# Altium PCB TeenAstro_ZH-1_2022-06-06.pcbdoc (part 2 of 2)
Units mm, origin at the board's own origin, x right, y up, seen from the top; angles counter-clockwise.
Board outline 53 x 62 mm, 4 copper layers (Top Layer, Mid-Layer 1, Mid-Layer 2, Bottom Layer); 108 components, 116 nets, 365 pads, 202 vias.
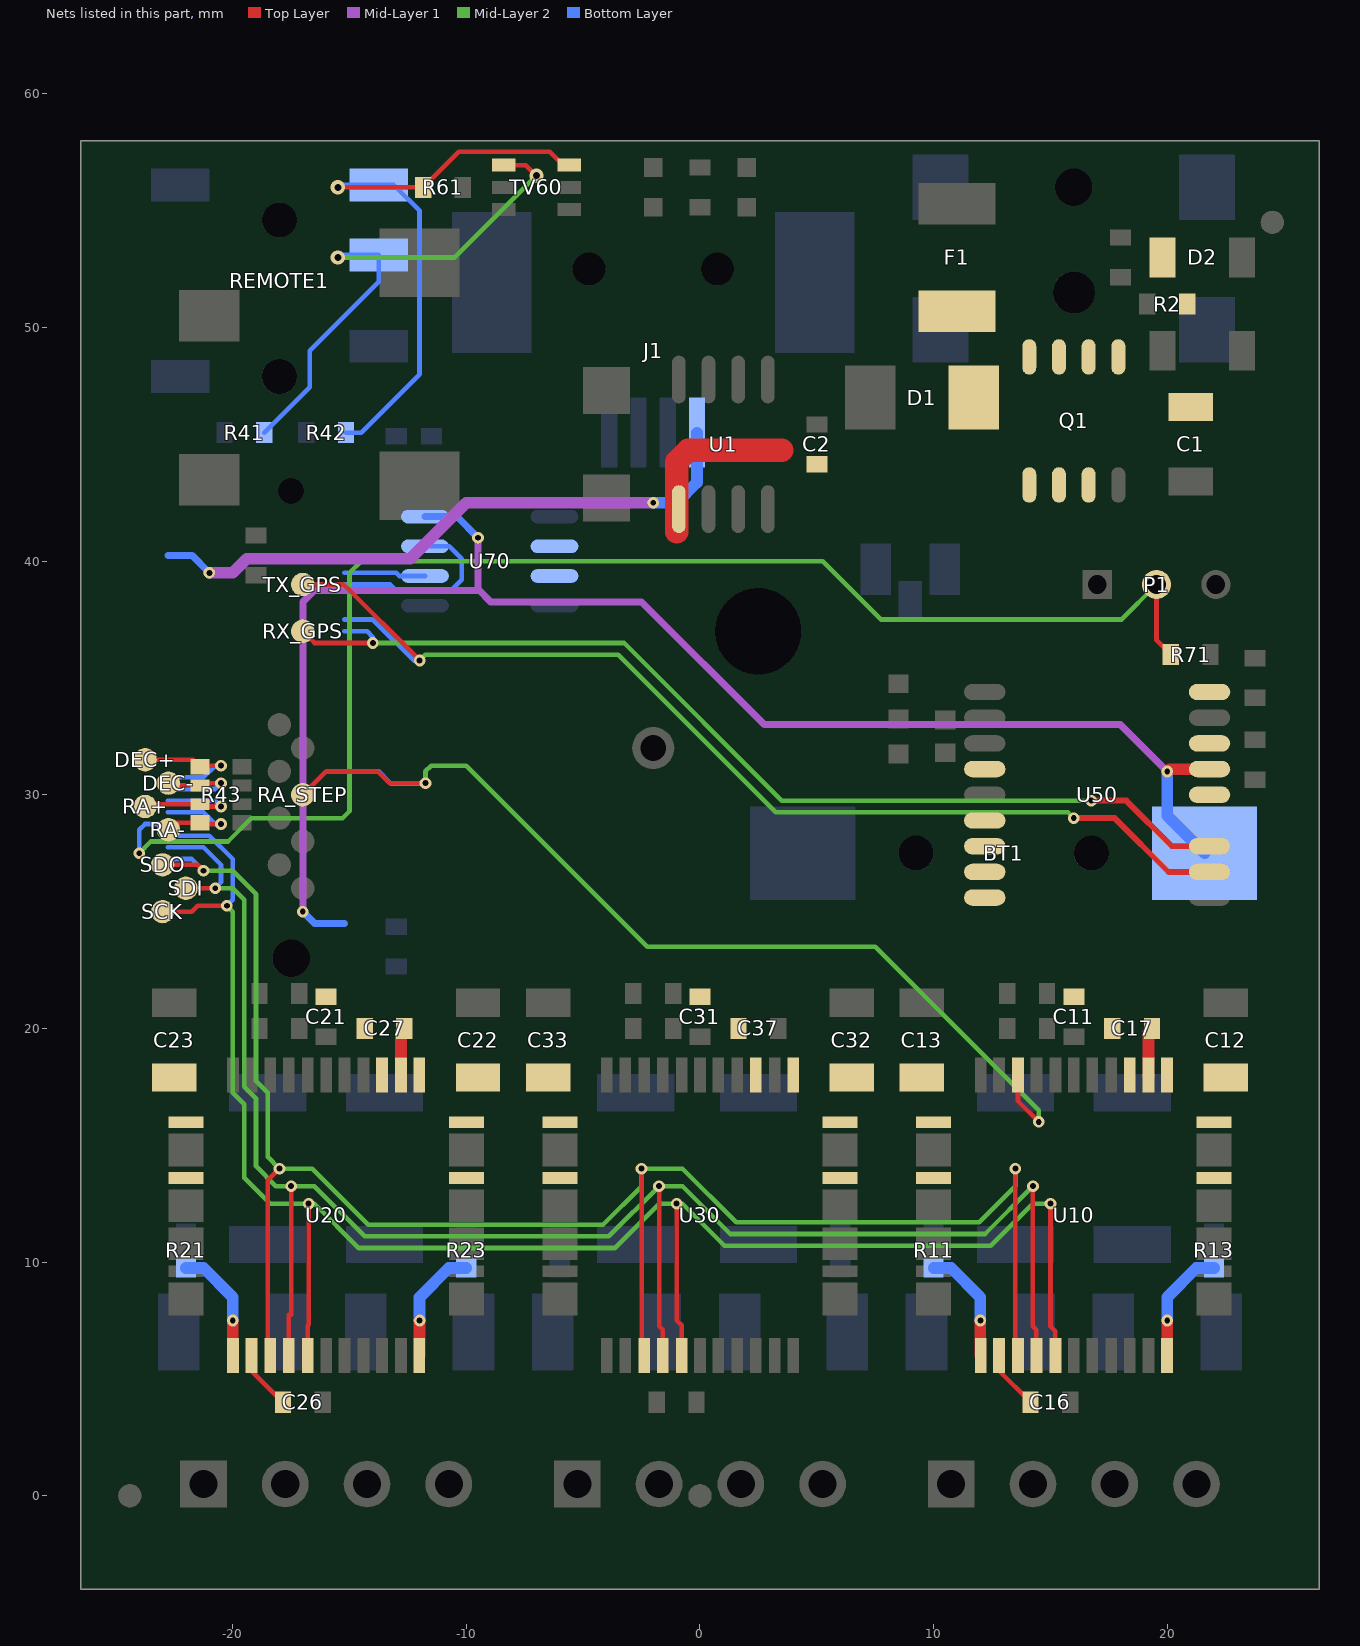
[diagram p4: the nets of this part, all layers, seen from the top]

## Via types
v1: diameter 1, hole 0.5, Top Layer to Bottom Layer, 111 vias
v2: diameter 0.5, hole 0.25, Top Layer to Bottom Layer, 84 vias
v3: diameter 0.61, hole 0.305, Top Layer to Bottom Layer, 7 vias

## Nets (pads, with @x,y where several pads share a name; then routed paths per layer and width w, separated by ;. In a path a pad name is that pad's centre, name@x,y a point inside that pad or via, vN(x,y) a via of type N, cw(c..) or ccw(c..) an arc to the next point about the centre after c; other vN are vias at no path point) (continued)
RA_STEP: RA_STEP.1 U10.42 | length 45.4
  Top Layer w0.2: RA_STEP.1@-17,30 -16,31 -13.786,31 -13.278,30.492 -11.758,30.492 v2(-11.75,30.5) ; U10.42@13.613,18.001 13.612,16.888 v2@14.499,15.999
  Mid-Layer 2 w0.2: v2(-11.75,30.5) -11.75,31 -11.501,31.249 -10,31.249 -2.25,23.5 7.501,23.5 14.499,16.499 v2@14.499,15.999
  Bottom Layer w0.2: -15.224,31 -13.749,31 -13.251,30.5 v2(-11.75,30.5)
  other v2: 14.5,16
RX_GPS: RX_GPS.1 U50.3 | length 44.2
  Top Layer w0.2: RX_GPS.1@-17,37.001 -16.499,36.5 v2(-14,36.5)
  Top Layer w0.25: v2(16.75,29.75) 18.25,29.751 20.201,27.8 U50.3@21.812,27.8
  Mid-Layer 2 w0.2: v2(-14,36.5) -3.251,36.499 3.498,29.751 v2(16.75,29.75)
  Bottom Layer w0.2: -15.224,37 -14.249,37 -14,36.751 v2(-14,36.5)
RX_REMOTE: R41.1 REMOTE1.3 TV60.4 | length 23
  Top Layer w0.2: TV60.4@-8.399,56.951 -7.449,56.951 v3(-7,56.5)
  Mid-Layer 2 w0.2: v3@-15.5,53 -10.5,53 v3(-7,56.5)
  Bottom Layer w0.2: R41.1@-18.65,45.5 -16.7,47.449 -16.7,49.001 -13.749,51.95 -13.749,53.101 -15.4,53.101 v3@-15.499,52.999
  other v3: -15.5,53
S$976: 
S$978: 
S$984: 
S$986: 
S$988: 
SCK: SCK.1 U10.16 U20.16 U30.16 | length 77.8
  Top Layer w0.2: SCK.1@-22.999,25.001 -21.75,25.001 -21.501,25.25 v2(-20.25,25.25) ; U20.16@-16.786,6.001 -16.786,7.287 -16.751,7.322 v2(-16.75,12.5) ; v2(-1,12.5) -1,7.5 -0.787,7.287 U30.16@-0.786,6.001 ; v2(15,12.5) 14.999,7.251 15.213,7.038 U10.16@15.213,6.001
  Mid-Layer 2 w0.2: v2(-20.25,25.25) -20,25.001 -20,17.251 -19.499,16.751 -19.499,13.601 -18.399,12.501 v2(-16.75,12.5) -16.499,12.501 -14.599,10.599 -3.65,10.599 -1.75,12.499 -1,12.499 -0.749,12.499 1.049,10.701 12.452,10.701 14.25,12.499 v2@14.999,12.499
  Bottom Layer w0.2: -22.776,28.249 -21,28.249 -20,27.251 -20,25.499 v2(-20.25,25.25)
SCL: U70.7 | length 8.1
  Bottom Layer w0.2: -15.224,39.001 -13.251,39.001 -12.951,38.699 -10.701,38.699 -10.2,39.199 -10.2,40.101 -10.736,40.635 U70.7@-11.772,40.635
SDA: U70.6 | length 3.5
  Bottom Layer w0.2: -15.224,39.499 -12.999,39.499 -12.865,39.365 U70.6@-11.772,39.365
SDI: SDI.1 U10.15 U20.15 U30.15 | length 77.1
  Top Layer w0.2: SDI.1@-22,26.001 v2(-20.75,26) ; U20.15@-17.599,6.001 -17.599,7.749 -17.5,7.749 v2(-17.5,13.25) ; v2(-1.75,13.25) -1.75,7.251 -1.6,7.099 U30.15@-1.6,6.001 ; v2(14.25,13.25) 14.25,7.251 14.4,7.101 U10.15@14.4,6.001
  Mid-Layer 2 w0.2: v2@-20.749,25.999 -20,25.999 -19.499,25.501 -19.499,17.5 -18.999,17 -18.999,14.099 -18.15,13.251 v2(-17.5,13.25) -16.502,13.251 -14.351,11.099 -3.901,11.099 v2(-1.75,13.25) -0.749,13.251 1.301,11.201 12.2,11.201 v2(14.25,13.25)
  Bottom Layer w0.2: -22.776,27.749 -21.249,27.749 -20.5,27 -20.5,26.25 v2@-20.749,25.999
SDO: SDO.1 U10.14 U20.14 U30.14 | length 79
  Top Layer w0.2: SDO.1@-23,27 -21.5,27 v2(-21.25,26.75) ; U20.14@-18.386,6.001 -18.501,6.116 -18.501,13.5 v2(-18,14) ; v2@-2.499,14 -2.499,6.113 U30.14@-2.386,6.001 ; v2@13.501,14 13.501,6.113 U10.14@13.613,6.001
  Mid-Layer 2 w0.2: v2@-21.249,26.751 -20,26.751 -18.999,25.75 -18.999,17.749 -18.501,17.251 -18.501,14.5 v2(-18,14) -16.601,14 -14.201,11.6 -4.15,11.6 -2.499,13.251 -2.499,14 -0.749,14 1.55,11.699 11.949,11.699 13.501,13.251 v2@13.501,14
  Bottom Layer w0.2: -22.776,27.251 -21.75,27.251 v2@-21.249,26.751
  other v2: -2.5,14 13.5,14
ST4_DEC+: DEC+.1 R43.5 | length 5.9
  Top Layer w0.2: DEC+.1@-23.749,31.501 -21.701,31.501 -21.399,31.201 -21.351,31.249 v2@-20.5,31.249
  Bottom Layer w0.2: -22.776,30.751 -21.249,30.751 -20.749,31.249 v2@-20.5,31.249
  other v2: -20.5,31.25
ST4_DEC-: DEC-.1 R43.6 | length 4.7
  Top Layer w0.2: DEC-.1@-22.749,30.5 -22.75,30.48 -22.669,30.401 -21.399,30.401 -21.3,30.5 v2(-20.5,30.5)
  Bottom Layer w0.2: -22.776,30.251 -20.749,30.251 v2(-20.5,30.5)
ST4_RA+: R43.7 RA+.1 | length 5.7
  Top Layer w0.2: RA+.1@-23.749,29.499 -23.649,29.601 -21.399,29.601 -21.3,29.499 v2@-20.5,29.499
  Bottom Layer w0.2: -22.776,29.751 -20.749,29.751 v2@-20.5,29.499
  other v2: -20.5,29.5
ST4_RA-: R43.8 RA-.1 | length 4.9
  Top Layer w0.2: RA-.1@-22.75,28.5 -22.451,28.801 -21.399,28.801 -21.351,28.75 v2(-20.5,28.75)
  Bottom Layer w0.2: -22.776,29.25 -21.249,29.25 -20.749,28.75 v2(-20.5,28.75)
TEMP: P1.2 R71.1 | length 61.9
  Top Layer w0.2: P1.2@19.541,39.001 19.541,36.611 R71.1@20.15,35.999
  Mid-Layer 2 w0.2: v2(-24,27.5) -23.499,28.001 -20.2,28.001 -19.199,29.001 -15.3,29.001 -15.001,29.301 -15.001,39.499 -14.5,40 5.251,40 7.75,37.5 18.04,37.5 P1.2@19.541,39.001
  Bottom Layer w0.2: v2(-24,27.5) -24,28.501 -23.751,28.75 -22.776,28.75
TX_GPS: TX_GPS.1 U50.2 | length 48.1
  Top Layer w0.2: TX_GPS.1@-17,39.001 -15.251,39.001 v2(-12,35.75)
  Top Layer w0.25: v2(16,29) 17.75,29.001 20.051,26.7 U50.2@21.812,26.7
  Mid-Layer 2 w0.2: v2(-12,35.75) -11.75,35.999 -3.5,35.999 3.249,29.25 15.751,29.25 v2(16,29)
  Bottom Layer w0.2: -15.224,37.5 -14,37.5 -12.25,35.75 v2(-12,35.75)
TX_REMOTE: R42.1 R61.2 REMOTE1.2 TV60.3 | length 26
  Top Layer w0.2: v3@-15.499,55.999 -11.849,55.999 -10.325,57.525 -6.425,57.525 -5.849,56.949 TV60.3@-5.6,56.949
  Bottom Layer w0.2: v3@-15.499,55.999 -15.4,56.101 -13.749,56.101 -13.101,56.101 -12.001,55.001 -12.001,48.001 -14.5,45.501 R42.1@-15.15,45.5
  other v3: -15.5,56
U7_2: U70.2
U7_3: U70.3
U10_12: R11.1 U10.12 | length 5
  Top Layer w0.5: v2(12,7.5) 11.999,6.012 U10.12@12.012,6.001
  Bottom Layer w0.5: R11.1@10,9.746 10.752,9.746 11.999,8.501 v2(12,7.5)
U10_13: C16.1 U10.13 | length 2.6
  Top Layer w0.2: U10.13@12.8,6.001 12.8,5.349 C16.1@14.149,4
U10_22: R13.1 U10.22 | length 5
  Top Layer w0.5: U10.22@19.988,6.001 20,6.014 v2(20,7.5)
  Bottom Layer w0.5: v2(20,7.5) 20,8.501 21.248,9.746 R13.1@21.999,9.746
U10_35: C17.1 U10.35 | length 2.1
  Top Layer w0.5: U10.35@19.201,18.001 19.2,19.852 C17.1@19.35,20
U20_12: R21.1 U20.12 | length 5
  Top Layer w0.5: v2(-20,7.5) -20,6.014 U20.12@-19.987,6.001
  Bottom Layer w0.5: R21.1@-21.998,9.746 -21.247,9.746 -20,8.501 v2(-20,7.5)
U20_13: C26.1 U20.13 | length 2.6
  Top Layer w0.2: U20.13@-19.199,6.001 -19.199,5.349 C26.1@-17.85,4
U20_22: R23.1 U20.22 | length 5
  Top Layer w0.5: U20.22@-12.011,6.001 -12.001,6.012 v2(-12,7.5)
  Bottom Layer w0.5: v2(-12,7.5) -12.001,8.498 -10.754,9.746 R23.1@-10,9.746
U20_35: C27.1 U20.35 | length 2.1
  Top Layer w0.5: U20.35@-12.798,18.001 -12.799,19.852 C27.1@-12.649,20
U40_4: 
U40_8: 
U40_34: 
U40_38: 
U40_41: 
U40_43: 
U40_48: 
U40_58: 
U40_68: 
U40_70: 
U50_5: U50.5
U50_7: U50.7
U50_9: U50.9
U50_13: U50.13
U50_15: U50.15
U50_16: U50.16
U50_17: U50.17
U50_18: U50.18
VBAT: BT1.1 U50.6 U70.8 | length 68.8
  Top Layer w0.5: v2(20,31) 20.099,31.099 U50.6@21.812,31.1
  Mid-Layer 1 w0.3: v2(-17,25) -17,38.249 -16.499,38.75 -9.499,38.75 -9.499,41 -9.499,38.801 -8.956,38.255 -2.499,38.255 2.756,32.999 18.001,32.999 v2(20,31)
  Bottom Layer w0.3: v2(-17,25) -16.499,24.5 -15.224,24.5 ; U70.8@-11.772,41.905 -10.406,41.905 v2@-9.499,41
  Bottom Layer w0.5: v2(20,31) 20,29.1 BT1.1@21.601,27.5
  other v2: -9.5,41
VCC: C1.1 C2.2 C11.2 C12.2 C13.2 C17.2 C21.2 C22.2 C23.2 C27.2 C31.2 C32.2 C33.2 C37.2 D2.1 Q1.1 Q1.2 Q1.3 R2.2 U1.1 U10.1 U10.4 U10.30 U10.33 U10.34 U10.36 U20.1 U20.4 U20.30 U20.33 U20.34 U20.36 U30.1 U30.4 U30.30 U30.33 U30.34 U30.36 | length 7.7
  Top Layer w1: U1.1@-1,41.249 -1,44.249 -0.5,44.749 3.501,44.749
VIN: D1.1 F1.1 Q1.5 Q1.6 Q1.7 Q1.8
VUSB_IN: J1.1 | length 26.7
  Mid-Layer 1 w0.5: v2@-21,39.499 -19.997,39.502 -19.4,40.101 -12.4,40.101 -10.002,42.499 v2@-2.001,42.499
  Bottom Layer w0.3: -22.776,40.251 -21.75,40.251 v2@-21,39.499
  Bottom Layer w0.5: v2@-2.001,42.499 -1,42.499 -0.129,43.37 J1.1@-0.129,45.501
  other v2: -21,39.5 -2,42.5
X1: 
pads on no net: BT1. DC_IN. DC_IN.3 J1. REMOTE1. REMOTE1.5 U10.20 U10.37 U10.38 U20.20 U20.37 U20.38 U30.20 U30.37 U30.38 U40.

## Polygon pours and split planes (outlines as drawn)
GND on Bottom Layer "Bottom Layer-GND" (solid, shelved, pour order 0): -26.5,58 26.5,58 26.5,-4 -26.5,-4
GND on Mid-Layer 2 "Mid-Layer 2-GND" (solid, shelved, pour order 1): -26.5,58 26.5,58 26.5,-4 -26.5,-4
GND on Top Layer "Top Layer-GND" (solid, shelved, pour order 5): -26.5,58 26.5,58 26.5,-4 -26.5,-4
VCC on Top Layer "Top Layer-VCC" (solid, shelved, pour order 3): -24,25.5 -24,13 24,13 24,23 23,23 23,55 18,55 18,47 16,45 -1.5,45 -1.5,25.5
VIN on Top Layer "Top Layer-VIN" (solid, shelved, pour order 4): 18,47 16,45 8.5,45 8.5,53 18,53
+3.3V on Top Layer "Top Layer-+3.3V" (solid, shelved, pour order 2): 2.5,37 -23.5,37 -23.5,46.5 -9,46.5 -6.5,44 2.5,44
GND on Mid-Layer 1 "Mid-Layer 1-GND" (solid, shelved, pour order 6): -26.5,58 26.5,58 26.5,-4 -26.5,-4

## Keep-outs
Keep-Out Layer:
  lines w0.254: -26.5,-2 ccw(c-24.5,-2) -24.5,-4 ; -26.5,56 cw(c-24.5,56) -24.5,58 ; 24.5,-4 ccw(c24.5,-2) 26.5,-2 ; 24.5,58 cw(c24.5,56) 26.5,56

## Other copper
Top Layer:
  drawing of 305 lines, arcs and shapes, not listed
Mid-Layer 1:
  region net +3.3V: 14.938,20.916 14.563,20.916 14.5,21.091 15,21.091
  region net +3.3V: -1.234,21 -1.499,20.734 -1.667,20.814 -1.314,21.168
  region net +3.3V: -17.084,20.563 -17.085,20.938 -16.91,21.001 -16.908,20.501
  region net +3.3V: -17.233,21 -17.499,20.735 -17.667,20.816 -17.312,21.168
  region net +3.3V: -19.012,28.165 -19.387,28.166 -19.449,28.341 -18.949,28.34
  region net +3.3V: -19.012,27.835 -19.387,27.834 -19.449,27.659 -18.949,27.66
  region net +3.3V: -9.27,56.071 -9.469,55.753 -9.357,55.602 -9.085,56.037
  region net +3.3V: -9.494,55.75 -9.759,56.016 -9.927,55.936 -9.574,55.583
  region net +3.3V: 1.835,53.813 1.835,54.188 1.66,54.25 1.66,53.75
  region net +3.3V: 1.765,41.25 1.501,40.983 1.333,41.062 1.685,41.417
  region net +3.3V: 1.916,40.813 1.916,41.188 2.09,41.25 2.091,40.75
  region net +3.3V: 22.935,33.112 22.934,33.487 22.759,33.549 22.761,33.049
  region net +3.3V: 23.287,33.134 22.912,33.135 22.849,32.96 23.349,32.959
  region net +3.3V: -14.484,22.751 -14.749,23.016 -14.917,22.936 -14.564,22.583
  region net +3.3V: -14.335,22.813 -14.335,23.188 -14.16,23.25 -14.16,22.75
  region net +3.3V: -14.532,47.913 -13.805,47.728 -13.832,48.096 -14.332,48.223
  region net +3.3V: -14.531,43.999 -14.001,43.469 -13.842,43.805 -14.195,44.158
  region net +3.3V: -22.124,45.17 -22.874,45.169 -22.749,44.819 -22.249,44.82
  region net VUSB_IN: -20.834,39.313 -20.834,39.688 -20.659,39.75 -20.659,39.25
  region net VUSB_IN: -2.164,42.312 -2.166,42.687 -2.341,42.749 -2.339,42.249
  region net VBAT: 20.016,31.25 19.751,30.985 19.654,31.135 19.866,31.347
  region net VBAT: -16.812,25.165 -17.187,25.165 -17.15,25.34 -16.85,25.34
  region net VBAT: -9.312,40.835 -9.687,40.834 -9.649,40.659 -9.349,40.66
  region net VBAT: -9.312,40.835 -9.687,40.834 -9.649,40.659 -9.349,40.66
  region net +3.3V: 17.625,39.257 16.739,38.375 17.536,38.11 17.89,38.463
  region net +3.3V: 16.375,38.739 17.257,39.625 16.463,39.89 16.11,39.536
Mid-Layer 2:
  region net TEMP: 18.916,39.04 19.579,38.376 19.009,38.328 18.867,38.469
  region net SDO: -17.834,13.813 -17.834,14.188 -17.659,14.1 -17.659,13.9
  region net SDO: -17.985,14.25 -18.249,13.984 -18.311,14.17 -18.17,14.311
  region net SDI: -17.334,13.063 -17.335,13.438 -17.16,13.351 -17.159,13.151
  region net SDI: -17.665,13.438 -17.666,13.063 -17.84,13.151 -17.84,13.351
  region net SCK: -16.583,12.314 -16.585,12.689 -16.5,12.601 -16.499,12.401
  region net SCK: -16.914,12.688 -16.916,12.313 -17.091,12.401 -17.09,12.601
  region net SDO: -2.312,13.835 -2.687,13.834 -2.599,13.659 -2.399,13.66
  region net SDO: -2.334,13.813 -2.334,14.188 -2.159,14.1 -2.159,13.9
  region net SDI: -1.584,13.063 -1.585,13.438 -1.41,13.351 -1.409,13.151
  region net SDI: -1.734,13 -1.999,13.266 -2.061,13.08 -1.92,12.939
  region net SCK: -1.164,12.312 -1.166,12.687 -1.341,12.599 -1.34,12.399
  region net SCK: -0.833,12.687 -0.835,12.312 -0.749,12.399 -0.748,12.599
  region net SDO: 13.688,13.835 13.313,13.834 13.401,13.66 13.601,13.66
  region net SDI: 14.265,13 14.001,13.266 13.938,13.081 14.08,12.939
  region net SCK: 14.836,12.312 14.834,12.687 14.659,12.599 14.66,12.399
  region net SDO: -21.084,26.563 -21.085,26.938 -20.91,26.851 -20.909,26.651
  region net SDI: -20.584,26.187 -20.585,25.812 -20.41,25.899 -20.409,26.099
  region net SCK: -20,25.266 -20.265,25 -20.079,24.939 -19.938,25.081
  region net TX_GPS: 16.016,29.25 15.751,28.985 15.689,29.171 15.831,29.312
  region net RX_GPS: 16.585,29.938 16.585,29.563 16.41,29.651 16.41,29.851
  region net PPS_GPS: 17.335,30.313 17.335,30.688 17.16,30.6 17.16,30.4
  region net RX_GPS: -13.834,36.687 -13.835,36.312 -13.66,36.399 -13.659,36.599
  region net TX_GPS: -11.75,35.734 -12.015,36 -11.829,36.061 -11.688,35.919
  region net PPS_GPS: -11.75,37.266 -12.015,37 -11.83,36.939 -11.688,37.08
  region net D+: -20.834,41.937 -20.835,41.562 -20.749,41.65 -20.749,41.85
  region net D-: -20.278,41.116 -20.642,41.205 -20.532,41.358 -20.305,41.303
  region net TEMP: -23.75,27.484 -24.015,27.75 -23.83,27.811 -23.688,27.67
  region net RA_STEP: 14.687,16.166 14.312,16.165 14.399,16.34 14.599,16.341
  region net RA_DIR: 15.687,16.166 15.312,16.165 15.4,16.25 15.6,16.251
  region net RA_CS: 17.688,13.665 17.313,13.666 17.401,13.841 17.601,13.84
  region net RA_ENA: 18.687,13.666 18.312,13.665 18.399,13.84 18.599,13.841
  region net FOC_CS: 1.687,13.666 1.312,13.665 1.399,13.84 1.599,13.841
  region net FOC_ENA: 2.687,13.666 2.312,13.665 2.4,13.841 2.6,13.841
  region net FOC_STEP: -1.313,16.166 -1.688,16.165 -1.601,16.34 -1.401,16.341
  region net FOC_DIR: -0.687,16.165 -0.312,16.165 -0.4,16.251 -0.6,16.251
  region net DEC_CS: -14.313,13.666 -14.688,13.665 -14.6,13.84 -14.4,13.841
  region net DEC_ENA: -13.484,13.75 -13.749,13.484 -13.811,13.67 -13.67,13.812
  region net DEC_STEP: -17.25,15.984 -17.516,16.25 -17.33,16.311 -17.188,16.17
  region net DEC_DIR: -16.25,15.984 -16.515,16.25 -16.329,16.311 -16.188,16.169
  region net DEC_DIR: -13.063,26.834 -13.438,26.835 -13.351,26.66 -13.151,26.659
  region net DEC_STEP: -13.812,27.585 -14.187,27.585 -14.1,27.41 -13.9,27.41
  region net DEC_CS: -12.484,26 -12.749,26.265 -12.811,26.08 -12.67,25.938
  region net DEC_ENA: -11.735,25.251 -11.999,25.516 -12.061,25.331 -11.92,25.189
  region net FOC_STEP: -11.545,28.143 -11.634,27.779 -11.447,27.805 -11.391,28.033
  region net FOC_DIR: -12.334,28.937 -12.335,28.562 -12.16,28.65 -12.159,28.85
  region net FOC_CS: -13.084,29.687 -13.085,29.312 -12.91,29.399 -12.909,29.599
  region net FOC_ENA: -13.834,30.063 -13.835,30.438 -13.66,30.351 -13.659,30.151
  region net RA_STEP: -11.562,30.665 -11.937,30.666 -11.85,30.841 -11.65,30.84
  region net RA_DIR: -12.25,31.234 -12.515,31.5 -12.33,31.561 -12.188,31.42
  region net RA_CS: -13,31.985 -13.266,32.25 -13.081,32.312 -12.939,32.171
  region net RA_ENA: -13.834,32.563 -13.835,32.938 -13.66,32.85 -13.659,32.65
  region net LED2_1: -3.701,55.229 -3.702,54.772 -3.915,54.901 -3.915,55.101
  region net D-: -2.271,48.799 -2.728,48.798 -2.599,48.585 -2.399,48.585
  region net D+: -3.771,48.798 -4.229,48.799 -4.1,48.585 -3.9,48.585
  region net RX_REMOTE: -15.298,52.771 -15.298,53.229 -15.085,53.1 -15.085,52.9
  region net RX_REMOTE: -6.981,56.196 -7.304,56.519 -7.364,56.277 -7.222,56.136
  region net LED2_1: -10.728,46.452 -10.271,46.452 -10.4,46.665 -10.6,46.665
Bottom Layer:
  region net FOC_2: -1,1.161 -2.5,1.161 -2.25,1.861 -1.25,1.861
  region net FOC_3: 2.5,1.161 1,1.161 1.251,1.861 2.251,1.861
  region net R52_1: -1.405,31.325 -1.405,32.675 -0.775,32.25 -0.775,31.75
  region net F22_1: -17.001,1.161 -18.501,1.16 -18.252,1.86 -17.252,1.861
  region net F21_1: -13.528,1.19 -15.026,1.13 -14.805,1.839 -13.805,1.879
  region net F12_2: 15,1.161 13.5,1.16 13.75,1.86 14.75,1.861
  region net F11_2: 18.5,1.161 17,1.16 17.25,1.86 18.25,1.861
  region net RA_BMA1: 11.875,14.669 11.125,14.669 11,14.319 12,14.319
  region net RA_BMA1: 11.17,12.876 11.169,12.126 10.818,12.001 10.82,13.001
  region net RA_BMA1: 11.875,12.831 11.125,12.831 11,13.181 12,13.181
  region net RA_BMB1: 20.875,14.669 20.125,14.669 20,14.319 21,14.319
  region net RA_BMB1: 20.831,12.126 20.83,12.876 21.18,13.001 21.182,12.001
  region net RA_BMB1: 20.875,12.831 20.125,12.831 20,13.181 21,13.181
  region net FOC_BMB1: 4.875,14.669 4.125,14.669 4,14.319 5,14.319
  region net FOC_BMB1: 4.875,12.831 4.125,12.831 4,13.181 5,13.181
  region net FOC_BMB1: 4.831,12.126 4.83,12.876 5.18,13.001 5.182,12.001
  region net FOC_BMA1: -4.125,14.669 -4.875,14.669 -5,14.319 -4,14.319
  region net FOC_BMA1: -4.83,12.876 -4.831,12.126 -5.181,12.001 -5.18,13.001
  region net FOC_BMA1: -4.125,12.831 -4.875,12.831 -5,13.181 -4,13.181
  region net DEC_BMB1: -11.125,14.669 -11.875,14.669 -12,14.319 -11,14.319
  region net DEC_BMB1: -11.125,12.831 -11.875,12.831 -12,13.181 -11,13.181
  region net DEC_BMB1: -11.168,12.126 -11.17,12.876 -10.82,13.001 -10.818,12.001
  region net DEC_BMA1: -20.125,14.669 -20.875,14.669 -21,14.319 -20,14.319
  region net DEC_BMA1: -20.83,12.876 -20.831,12.126 -21.182,12.001 -21.18,13.001
  region net DEC_BMA1: -20.125,12.831 -20.875,12.831 -21,13.181 -20,13.181
  region net U20_12: -19.812,7.665 -20.187,7.666 -20.249,7.841 -19.749,7.84
  region net U20_22: -11.813,7.666 -12.188,7.665 -12.251,7.84 -11.751,7.842
  region net R31_1: -3.812,7.666 -4.187,7.665 -4.25,7.84 -3.75,7.841
  region net R33_1: 4.188,7.665 3.813,7.666 3.751,7.841 4.251,7.84
  region net U10_12: 12.187,7.666 11.812,7.665 11.749,7.84 12.249,7.841
  region net U10_22: 20.188,7.665 19.813,7.666 19.75,7.841 20.25,7.84
  region net DC_IN_1: 7.969,55.999 8.499,55.469 8.835,55.628 8.128,56.335
  region net DC_IN_1: 13.001,55.47 13.532,55.999 13.374,56.335 12.665,55.629
  region net GND: 19.331,55.624 19.33,56.374 19.68,56.5 19.681,55.5
  region net D3_2: 19.175,43.831 18.425,43.831 18.55,44.181 19.05,44.181
  region net D3_2: 17.969,50.501 18.499,51.031 18.658,50.695 18.305,50.342
  region net GND: 20.343,55.625 20.343,56.375 20.693,56.5 20.693,55.5
  region net GND: 19.682,55.625 19.681,56.375 19.331,56.499 19.332,55.499
  region net GND: 24.67,55.625 24.669,56.375 24.319,56.499 24.32,55.499
  region net GND: 23.831,56.375 23.83,55.625 24.18,55.499 24.182,56.499
  region net GND: 23.17,55.625 23.169,56.375 22.819,56.499 22.82,55.499
  region net +3.3V: -14.616,23.221 -14.705,22.857 -14.872,22.91 -14.789,23.251
  region net +3.3V: -14.25,23.016 -14.515,22.751 -14.436,22.583 -14.082,22.937
  region net +3.3V: -13.874,47.83 -14.624,47.831 -14.749,48.181 -13.749,48.18
  region net +3.3V: -14.095,43.207 -14.26,43.939 -13.892,43.9 -13.78,43.4
  region net +3.3V: -14.999,43.531 -14.469,43.001 -14.875,42.913 -15.087,43.125
  region net SDO: -21.233,27 -21.499,26.735 -21.561,26.921 -21.419,27.062
  region net SDI: -20.5,25.985 -20.766,26.25 -20.58,26.312 -20.439,26.17
  region net SCK: -20,25.234 -20.265,25.5 -20.079,25.561 -19.938,25.419
  region net DEC_MA_SENSE: -19.125,9.831 -19.875,9.831 -19.749,10.181 -19.249,10.181
  region net DEC_MB_SENSE: -12.124,9.83 -12.874,9.831 -12.749,10.181 -12.249,10.181
  region net FOC_MA_SENSE: -3.125,9.831 -3.875,9.831 -3.75,10.181 -3.25,10.181
  region net FOC_MB_SENSE: 3.875,9.831 3.125,9.831 3.251,10.181 3.751,10.181
  region net RA_MA_SENSE: 12.875,9.831 12.125,9.831 12.25,10.181 12.75,10.181
  region net RA_MB_SENSE: 19.875,9.831 19.125,9.831 19.25,10.181 19.75,10.181
  region net R52_1: 6.835,31.813 6.835,32.188 6.66,32.25 6.66,31.75
  region net RX_GPS: -13.812,36.666 -14.187,36.665 -14.1,36.751 -13.9,36.751
  region net TX_GPS: -12.165,35.563 -12.165,35.938 -12.25,35.85 -12.25,35.65
  region net PPS_GPS: -12.164,37.438 -12.166,37.063 -12.341,37.151 -12.34,37.351
  region net D+: -21.165,41.562 -21.165,41.937 -21.34,41.85 -21.34,41.65
  region net D-: -20.665,41.188 -20.665,40.813 -20.84,40.9 -20.84,41.1
  region net VUSB_IN: -20.984,39.75 -21.249,39.484 -21.347,39.634 -21.135,39.847
  region net VUSB_IN: -1.834,42.687 -1.835,42.312 -1.66,42.249 -1.659,42.749
  region net ST4_DEC+: -20.615,31.028 -20.705,31.392 -20.858,31.281 -20.802,31.055
  region net ST4_DEC-: -20.484,30.251 -20.749,30.516 -20.811,30.33 -20.67,30.189
  region net ST4_RA+: -20.483,29.75 -20.749,29.485 -20.811,29.671 -20.669,29.812
  region net ST4_RA-: -20.616,28.972 -20.705,28.608 -20.858,28.718 -20.802,28.945
  region net TEMP: -23.812,27.665 -24.187,27.665 -24.1,27.84 -23.9,27.84
  region net DEC_DIR: -13.415,26.812 -13.415,27.187 -13.59,27.1 -13.59,26.9
  region net DEC_STEP: -13.984,27.501 -14.249,27.765 -14.311,27.58 -14.169,27.438
  region net DEC_CS: -12.665,26.438 -12.666,26.063 -12.84,26.151 -12.84,26.351
  region net DEC_ENA: -11.915,25.688 -11.916,25.313 -12.09,25.401 -12.09,25.601
  region net FOC_STEP: -11.915,28.188 -11.915,27.813 -12.09,27.901 -12.09,28.101
  region net FOC_DIR: -12.665,28.562 -12.665,28.937 -12.84,28.85 -12.84,28.65
  region net FOC_CS: -13.415,29.312 -13.416,29.687 -13.59,29.599 -13.59,29.399
  region net FOC_ENA: -13.984,30 -14.249,30.265 -14.311,30.079 -14.169,29.938
  region net RA_STEP: -11.915,30.313 -11.915,30.688 -12.09,30.6 -12.09,30.4
  region net RA_DIR: -12.665,31.062 -12.666,31.437 -12.84,31.349 -12.84,31.149
  region net RA_CS: -13.415,32.188 -13.416,31.813 -13.59,31.901 -13.59,32.101
  region net RA_ENA: -13.983,32.501 -14.249,32.765 -14.311,32.579 -14.169,32.438
  region net D-: -2.347,48.737 -2.78,48.881 -2.731,48.64 -2.531,48.573
  region net D+: -3.771,48.798 -4.229,48.799 -4.1,48.585 -3.9,48.585
  region net TX_REMOTE: -15.249,55.827 -15.36,56.271 -15.122,56.201 -15.072,56.001
  region net RX_REMOTE: -15.249,52.827 -15.36,53.271 -15.122,53.201 -15.072,53.001
  region net LED2_1: -10.728,46.048 -10.271,46.048 -10.4,45.835 -10.6,45.835
  region net VBAT: 20.188,30.835 19.813,30.835 19.75,30.659 20.25,30.66
  region net VBAT: -16.75,25.016 -17.015,24.751 -16.865,24.654 -16.653,24.866
  region net VBAT: -9.484,41.25 -9.749,40.985 -9.847,41.135 -9.634,41.347
  region net R51_2: 8.666,36.187 8.665,35.812 8.84,35.749 8.841,36.249
  region net VBAT: 20.625,29.5 19.375,29.5 19.75,30.25 20.25,30.25
  region net DC_IN_1: 11.5,54.752 11.5,57.252 13,56.502 13,55.502
  region net DC_IN_1: 9.1,57.252 9.1,54.752 8.502,55.502 8.502,56.502
  region net DC_IN_1: 9.1,54.6 11.5,54.6 10.8,53.1 9.8,53.1
  region net GND: 22.9,54.749 22.9,57.249 24.4,56.499 24.4,55.499
  region net GND: 20.5,57.25 20.5,54.75 20.011,55.499 20.011,56.499
  region net DC_IN_1: 11.5,51.301 9.1,51.301 9.8,52.801 10.8,52.801
  region net R51_2: 8.5,37.547 9.5,37.547 9.25,36.797 8.75,36.797
  region net R41_2: -20,45.543 -20.082,45.05 -19.816,44.825 -19.775,45.068
  region net RX_REMOTE: -18.388,45.95 -18.3,45.458 -18.08,45.93 -18.122,46.17
  region net R42_2: -17.2,45.551 -17.2,45.051 -17.5,44.859 -17.5,45.142
  region net TX_REMOTE: -14.8,45.251 -14.8,45.751 -14.5,45.601 -14.5,45.401
  region net VUSB_IN: -0.48,44 0.22,44 0.121,43.37 -0.379,43.37
  region net D-: -2.381,47 -2.881,47 -2.731,47.3 -2.531,47.3
  region net D+: -3.75,47 -4.23,47 -4.1,47.3 -3.9,47.3
  region net RA_BMB1: 23.194,6.64 23.194,8.409 23.501,7.489 23.194,6.64
  region net RA_BMB1: 23.194,8.409 23.147,8.55 23.194,8.65 23.194,8.409
  region net F11_2: 16.804,5.35 18.584,5.35 18.25,3.85 17.25,3.85
  region net RA_BMA1: 8.806,6.64 8.7,7.288 8.806,7.605 8.806,6.64
  region net RA_BMA1: 8.806,7.605 8.806,8.65 9.053,8.349 8.806,7.605
  region net F12_2: 13.415,5.35 15.195,5.35 14.75,3.85 13.75,3.85
  region net F21_1: -15.195,5.35 -13.415,5.35 -13.805,3.85 -14.805,3.85
  region net DEC_BMB1: -8.805,6.64 -8.805,7.606 -8.699,7.288 -8.805,6.64
  region net DEC_BMB1: -8.805,7.606 -9.053,8.349 -8.805,8.65 -8.805,7.606
  region net F22_1: -18.586,5.35 -16.806,5.35 -17.252,3.85 -18.252,3.85
  region net DEC_BMA1: -23.196,6.64 -23.5,7.487 -23.196,8.398 -23.196,6.64
  region net DEC_BMA1: -23.196,8.398 -23.196,8.65 -23.146,8.547 -23.196,8.398
  region net FOC_MA_SENSE: -5.568,10.85 -5.568,11.657 -4.368,11.654 -4.368,10.854
  region net R31_1: -5.568,10.15 -5.568,9.344 -5.247,9.496 -5.247,9.996
  region net FOC_MA_SENSE: -4.125,9.95 -2.875,9.95 -3.25,9.499 -3.75,9.499
  region net FOC_MB_SENSE: 5.568,11.657 5.568,10.85 4.368,10.854 4.368,11.654
  region net R33_1: 5.568,9.344 5.568,10.15 5.248,9.996 5.248,9.496
  region net FOC_MB_SENSE: 2.876,9.95 4.126,9.95 3.751,9.499 3.251,9.499
  region net RA_MA_SENSE: 10.432,10.85 10.432,11.657 11.632,11.654 11.632,10.854
  region net U10_12: 10.432,10.15 10.432,9.344 10.752,9.496 10.752,9.996
  region net RA_MB_SENSE: 21.568,11.657 21.568,10.85 20.368,10.854 20.368,11.654
  region net U10_22: 21.568,9.344 21.568,10.15 21.248,9.996 21.248,9.496
  region net DEC_MB_SENSE: -10.432,11.657 -10.432,10.85 -11.632,10.854 -11.632,11.654
  region net U20_22: -10.432,9.344 -10.432,10.15 -10.754,9.996 -10.754,9.496
  region net DEC_MA_SENSE: -21.568,10.85 -21.568,11.657 -20.368,11.654 -20.368,10.854
  region net U20_12: -21.568,10.15 -21.568,9.344 -21.247,9.496 -21.247,9.996
  region net RA_MA_SENSE: 11.875,9.95 13.125,9.95 12.75,9.499 12.25,9.499
  region net RA_MB_SENSE: 18.875,9.95 20.125,9.95 19.75,9.499 19.25,9.499
  region net DEC_MA_SENSE: -20.124,9.95 -18.874,9.95 -19.249,9.499 -19.749,9.499
  region net DEC_MB_SENSE: -13.124,9.95 -11.874,9.95 -12.249,9.499 -12.749,9.499
  region net +3.3V: -15,48.5 -12.999,48.5 -13.749,47.5 -14.749,47.5
  region net RX_REMOTE: -13.999,52.4 -13.499,52.4 -13.649,52.1 -13.849,52.1
  region net RX_REMOTE: -15,53.351 -15,52.851 -15.3,53.001 -15.3,53.201
  region net TX_REMOTE: -12.5,55.893 -12.586,55.4 -12.32,55.178 -12.278,55.419
  region net TX_REMOTE: -15,56.351 -15,55.851 -15.3,56.001 -15.3,56.201
  region net +3.3V: -11.05,43.3 -11.05,44 -10.3,43.9 -10.3,43.4
  region net +3.3V: -11.95,44 -11.95,43.3 -12.7,43.4 -12.7,43.9
  region net +3.3V: -12.55,43.3 -12.55,44 -11.8,43.9 -11.8,43.4
  region net +3.3V: -13.45,44 -13.45,43.3 -14.2,43.4 -14.2,43.9
  region net +3.3V: -13.45,23 -13.45,22.3 -14.15,22.401 -14.15,22.901
  region net FOC_3: 0.805,5.349 2.585,5.349 2.251,3.849 1.251,3.849
  region net FOC_BMB1: 7.195,6.64 7.195,7.606 7.3,7.288 7.195,6.64
  region net FOC_BMB1: 7.195,7.606 6.947,8.349 7.195,8.649 7.195,7.606
  region net FOC_2: -2.585,5.35 -0.805,5.35 -1.25,3.85 -2.25,3.85
  region net FOC_BMA1: -7.195,6.641 -7.299,7.288 -7.195,7.602 -7.195,6.641
  region net FOC_BMA1: -7.195,7.602 -7.195,8.65 -6.946,8.349 -7.195,7.602
  region net +3.3V: -14.849,42.149 -15.599,42.149 -15.374,42.599 -15.074,42.599
  region net D+: -22,41.599 -22,41.899 -21.7,41.85 -21.7,41.65
  region net D-: -22,41.099 -22,41.399 -21.7,41.349 -21.7,41.149
  region net LED2_1: -16,40.149 -16,39.849 -16.25,39.9 -16.25,40.1
  region net SDA: -14.45,39.349 -14.45,39.649 -14.15,39.599 -14.15,39.399
  region net SCL: -14.45,38.849 -14.45,39.149 -14.15,39.101 -14.15,38.901
  region net CE: -14.45,38.349 -14.45,38.649 -14.15,38.601 -14.15,38.401
  region net R41_2: -22,38.099 -22,38.399 -21.7,38.349 -21.7,38.149
  region net PPS_GPS: -14.45,37.849 -14.45,38.149 -14.15,38.101 -14.15,37.901
  region net R42_2: -22,37.599 -22,37.899 -21.7,37.849 -21.7,37.649
  region net TX_GPS: -14.45,37.349 -14.45,37.649 -14.15,37.6 -14.15,37.4
  region net RX_GPS: -14.45,36.849 -14.45,37.149 -14.249,37.1 -14.249,36.9
  region net RA_ENA: -14.45,32.349 -14.45,32.649 -14.249,32.599 -14.249,32.399
  region net RA_CS: -14.45,31.849 -14.45,32.149 -14.15,32.101 -14.15,31.901
  region net RA_DIR: -14.45,31.349 -14.45,31.649 -14.15,31.601 -14.15,31.401
  region net RA_STEP: -14.45,30.849 -14.45,31.149 -14.15,31.1 -14.15,30.9
  region net ST4_DEC+: -22,30.599 -22,30.899 -21.7,30.851 -21.7,30.651
  region net ST4_DEC-: -22,30.099 -22,30.399 -21.7,30.351 -21.7,30.151
  region net FOC_ENA: -14.45,29.849 -14.45,30.149 -14.249,30.1 -14.249,29.9
  region net ST4_RA+: -22,29.599 -22,29.899 -21.7,29.851 -21.7,29.651
  region net FOC_CS: -14.45,29.349 -14.45,29.649 -14.15,29.599 -14.15,29.399
  region net ST4_RA-: -22,29.099 -22,29.399 -21.7,29.35 -21.7,29.15
  region net FOC_DIR: -14.45,28.849 -14.45,29.149 -14.15,29.101 -14.15,28.901
  region net TEMP: -23.55,28.899 -23.55,28.599 -23.75,28.65 -23.75,28.85
  region net FOC_STEP: -14.45,28.349 -14.45,28.649 -14.15,28.601 -14.15,28.401
  region net SCK: -22,28.099 -22,28.399 -21.7,28.349 -21.7,28.149
  region net SDI: -22,27.599 -22,27.899 -21.7,27.849 -21.7,27.649
  region net DEC_STEP: -14.45,27.349 -14.45,27.649 -14.249,27.6 -14.249,27.4
  region net SDO: -22,27.099 -22,27.399 -21.75,27.351 -21.75,27.151
  region net DEC_DIR: -14.45,26.849 -14.45,27.149 -14.15,27.1 -14.15,26.9
  region net DEC_CS: -14.45,26.349 -14.45,26.649 -14.15,26.599 -14.15,26.399
  region net DEC_ENA: -14.45,25.849 -14.45,26.149 -14.15,26.099 -14.15,25.899
  region net +3.3V: -15.599,23.849 -14.849,23.849 -15.074,23.474 -15.374,23.474
  region net +3.3V: -7.145,42.13 -5.897,42.199 -6.919,42.949 -7.626,42.949
  region net VBAT: -11.043,42.199 -11.044,41.611 -10.594,41.755 -10.594,42.055
  region net SCL: -10.889,40.885 -10.889,40.385 -10.736,40.535 -10.736,40.735
  region net SDA: -12.655,39.115 -12.656,39.615 -12.865,39.465 -12.864,39.265
  region net CE: -12.655,37.845 -12.656,38.345 -12.956,38.195 -12.955,37.995

## Silkscreen, mask and mechanical layers (free items; w line width, h text height)
Top Overlay:
  text "JLCJLCJLCJLC" at 26.098,-0.2 h1.02 r90
Bottom Overlay:
  circle w0.5: c21.771,44.02 r0.25
  lines w0.25: 19.771,44.02 21.771,44.02 ; 19.771,45.02 20.771,45.02 ; 20.271,44.52 20.271,45.52 ; 21.271,43.154 ccw(c21.771,44.02) 21.271,44.886 ; 22.771,44.02 24.271,44.02 ; 23.271,45.02 24.271,45.02
  text "10-25V" at 18.5,42 h2
  text "CR1220" at 21,34 h2
  text "zUrp - 2022" at -26.393,28.634 h1.5 r270
  text "TeenAstro v3.0 - ZH-1" at 2.5,18.75 h1.5
Document:
  lines w0.254: -24.5,-4 24.5,-4 24.5,58 -24.5,58 -24.5,-4

## Text inside footprints (layer, text, board x,y; h text height)
U40: Document "MicroMod / Teensy 4.x" at -1.752,22.603 h2.03 r91